# EAGLE board strip14 - Copy (EAGLE 8.0.1)

Size 345.41 x 5 mm. Coordinates in mm from the lower left corner, seen from the top.
Outline: 0,0 345.41,0 345.41,5 0,5 0,0
Copper layers (1*16): Top 0.035mm / dielectric 1.5mm / Bottom 0.035mm
Design rules "default": minimum track width 10mil, minimum drill 24mil, track to track 8mil, track to pad 8mil, pad to pad 8mil, via to via 8mil, smd to smd 8mil, copper to edge 40mil, drill to drill 8mil, minimum pad ring 10mil, minimum via ring 8mil, stop-mask expansion 4mil, vias tented up to drill 0mil, thermal gap 10mil

## Footprints (pad centres in the part's own frame; a part is rotated, then mirrored left to right if it is on the bottom)
JDSTS2.EM-HRHT-XX52-1 = smd 3.71 x 2.2: 3V 0,0 | smd 1.47 x 2: GND 3,0

## Placement (x,y rotation side)
U$1  JDSTS2.EM-HRHT-XX52-1  [JDSTS2.EM-HRHT-XX52-1]  6,3 0 top
U$2  JDSTS2.EM-HRHT-XX52-1  [JDSTS2.EM-HRHT-XX52-1]  36.48,3 0 top
U$3  JDSTS2.EM-HRHT-XX52-1  [JDSTS2.EM-HRHT-XX52-1]  66.96,3 0 top
U$4  JDSTS2.EM-HRHT-XX52-1  [JDSTS2.EM-HRHT-XX52-1]  97.44,3 0 top
U$5  JDSTS2.EM-HRHT-XX52-1  [JDSTS2.EM-HRHT-XX52-1]  127.92,3 0 top
U$6  JDSTS2.EM-HRHT-XX52-1  [JDSTS2.EM-HRHT-XX52-1]  158.4,3 0 top
U$7  JDSTS2.EM-HRHT-XX52-1  [JDSTS2.EM-HRHT-XX52-1]  188.88,3 0 top
U$8  JDSTS2.EM-HRHT-XX52-1  [JDSTS2.EM-HRHT-XX52-1]  219.36,3 0 top
U$9  JDSTS2.EM-HRHT-XX52-1  [JDSTS2.EM-HRHT-XX52-1]  249.84,3 0 top
U$10  JDSTS2.EM-HRHT-XX52-1  [JDSTS2.EM-HRHT-XX52-1]  280.32,3 0 top
U$11  JDSTS2.EM-HRHT-XX52-1  [JDSTS2.EM-HRHT-XX52-1]  290,3 0 top
U$12  JDSTS2.EM-HRHT-XX52-1  [JDSTS2.EM-HRHT-XX52-1]  299,3 0 top
U$13  JDSTS2.EM-HRHT-XX52-1  [JDSTS2.EM-HRHT-XX52-1]  310,3 0 top
U$14  JDSTS2.EM-HRHT-XX52-1  [JDSTS2.EM-HRHT-XX52-1]  335,3 0 top

## Library data of the parts
U$1-U$14 = Smile_Shade

## Nets
N$1: U$1.3V U$2.GND
N$2: U$2.3V U$3.GND
N$3: U$3.3V U$4.GND
N$4: U$4.3V U$5.GND
N$5: U$5.3V U$6.GND
N$6: U$6.3V U$7.GND
N$7: U$7.3V U$8.GND
N$8: U$8.3V U$9.GND
N$9: U$9.3V U$10.GND
N$10: U$10.3V U$11.GND
N$11: U$11.3V U$12.GND
N$12: U$13.3V U$14.GND
N$13: U$12.3V U$13.GND

## Tracks (layer width: path | path; a pad name or v marks a point on that pad's centre or on a via)
N$1  (1 unrouted)
N$2  (1 unrouted)
N$3  (1 unrouted)
N$4  (1 unrouted)
N$5  (1 unrouted)
N$6  (1 unrouted)
N$7  (1 unrouted)
N$8  (1 unrouted)
N$9  (1 unrouted)
N$10  (1 unrouted)
N$11  (1 unrouted)
N$12  (1 unrouted)
N$13  (1 unrouted)
(copper drawn outside any net)
  shapes: Top area x2